# Altium PCB Akustikk_forsterkerkrets_v2.PcbDoc
Units mm, origin at the board's own origin, x right, y up, seen from the top; angles counter-clockwise.
Board outline 133.3 x 70 mm, 3 copper layers (Top Layer, Ground Plane, Bottom Layer), stack 0.488 mm thick; 48 components, 45 nets, 219 pads, 25 vias.
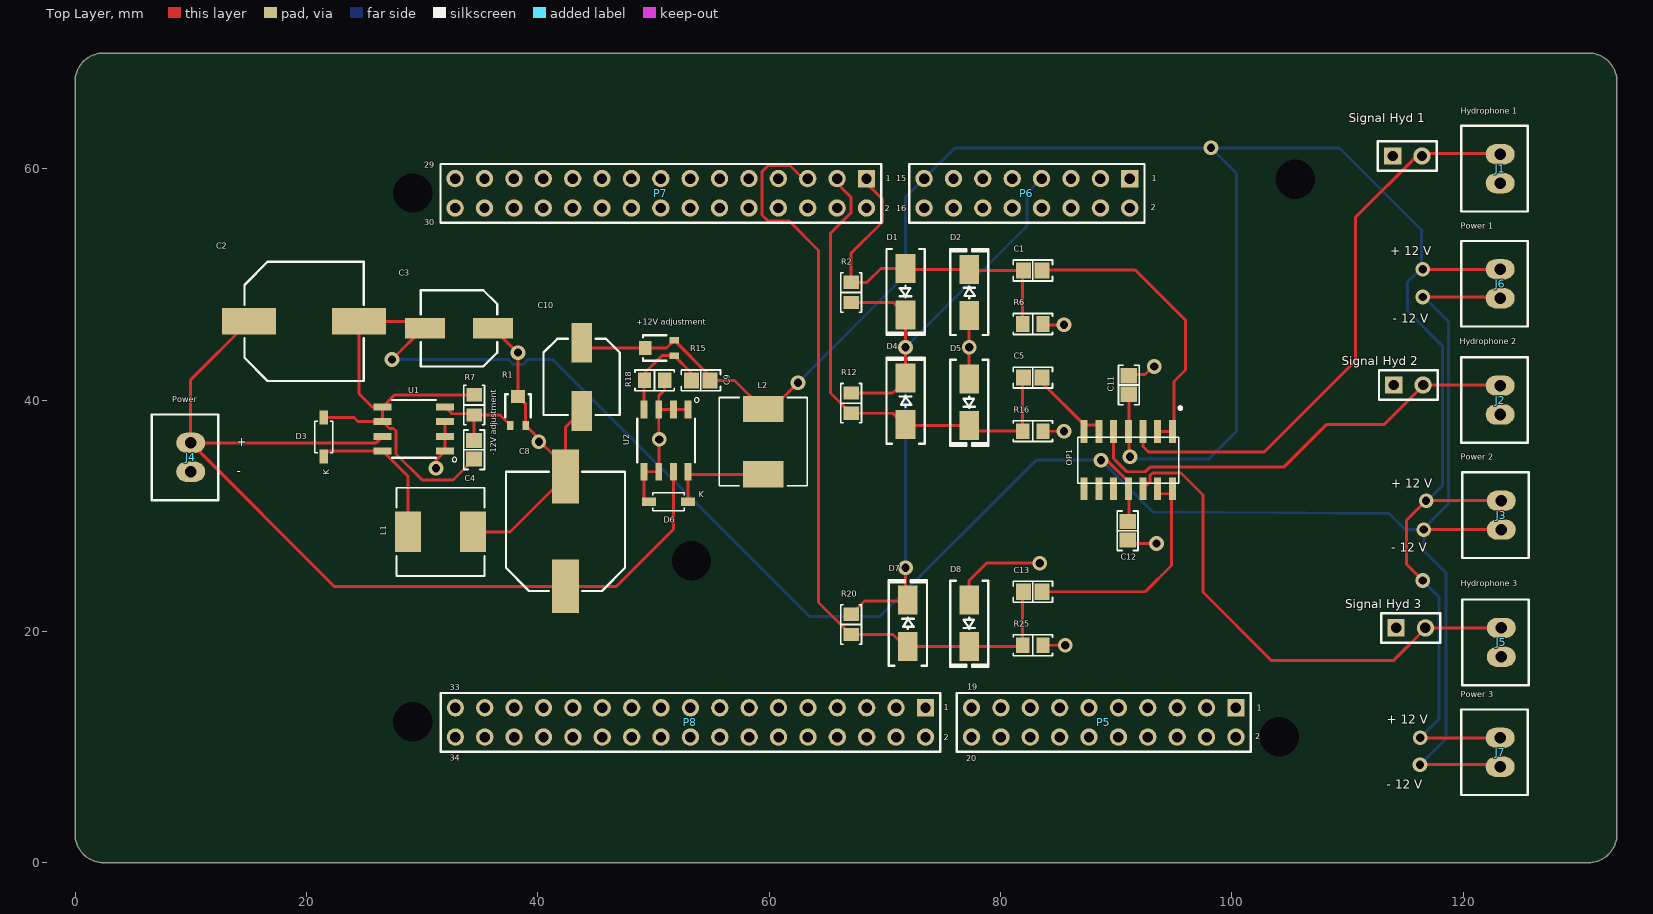
[diagram p0: Top Layer view]
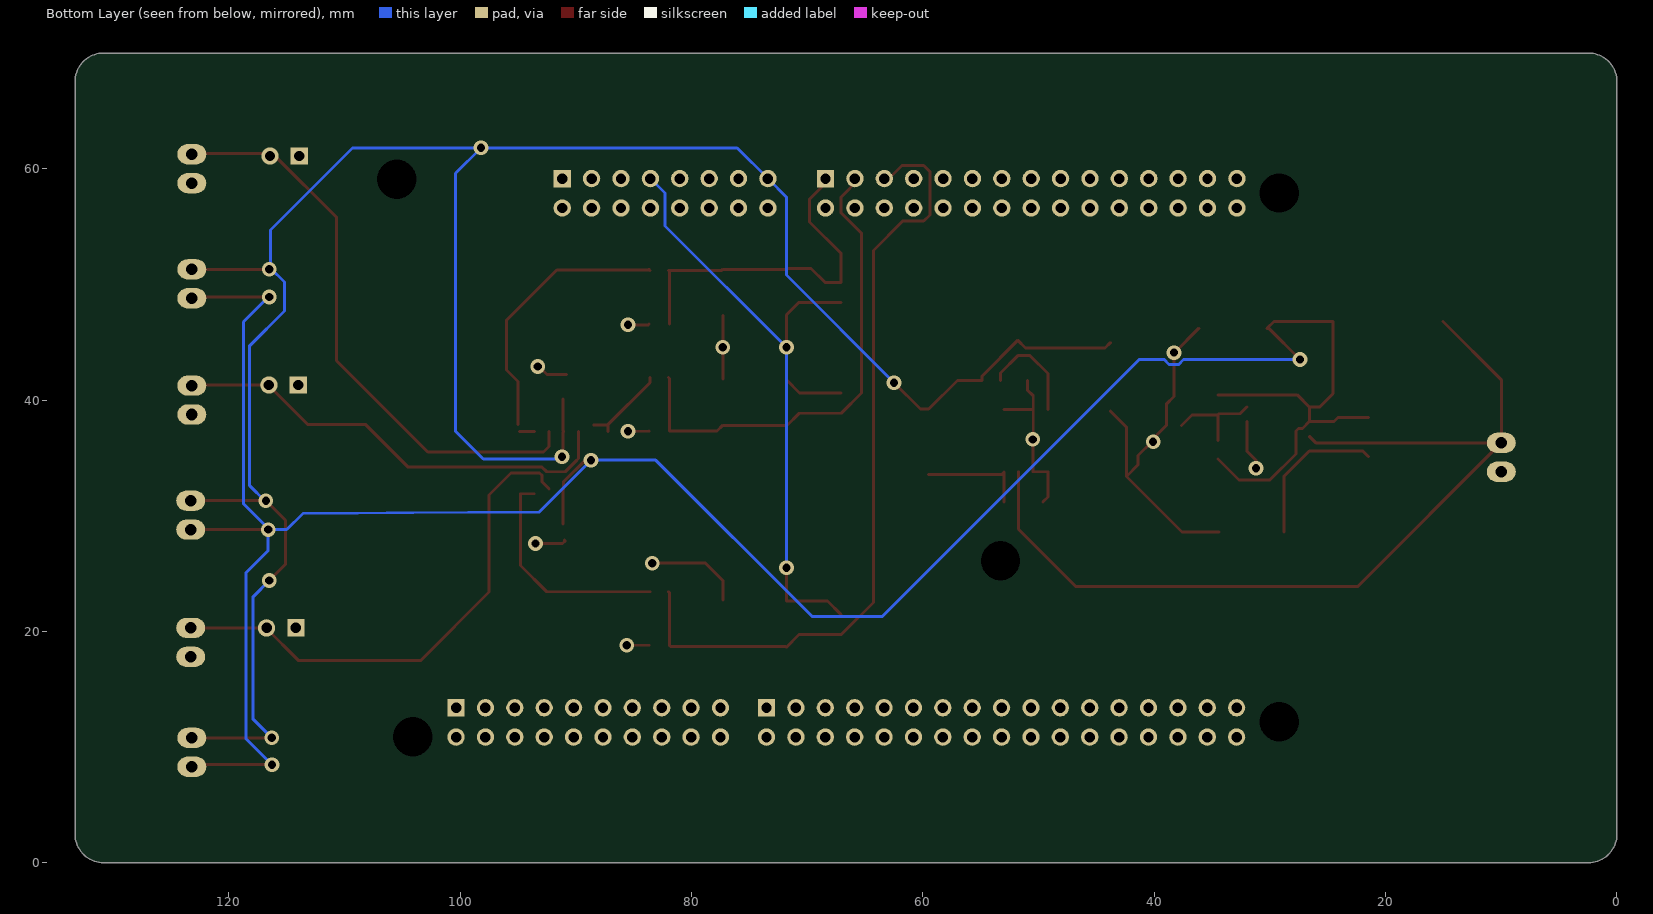
[diagram p1: Bottom Layer view, seen from below]
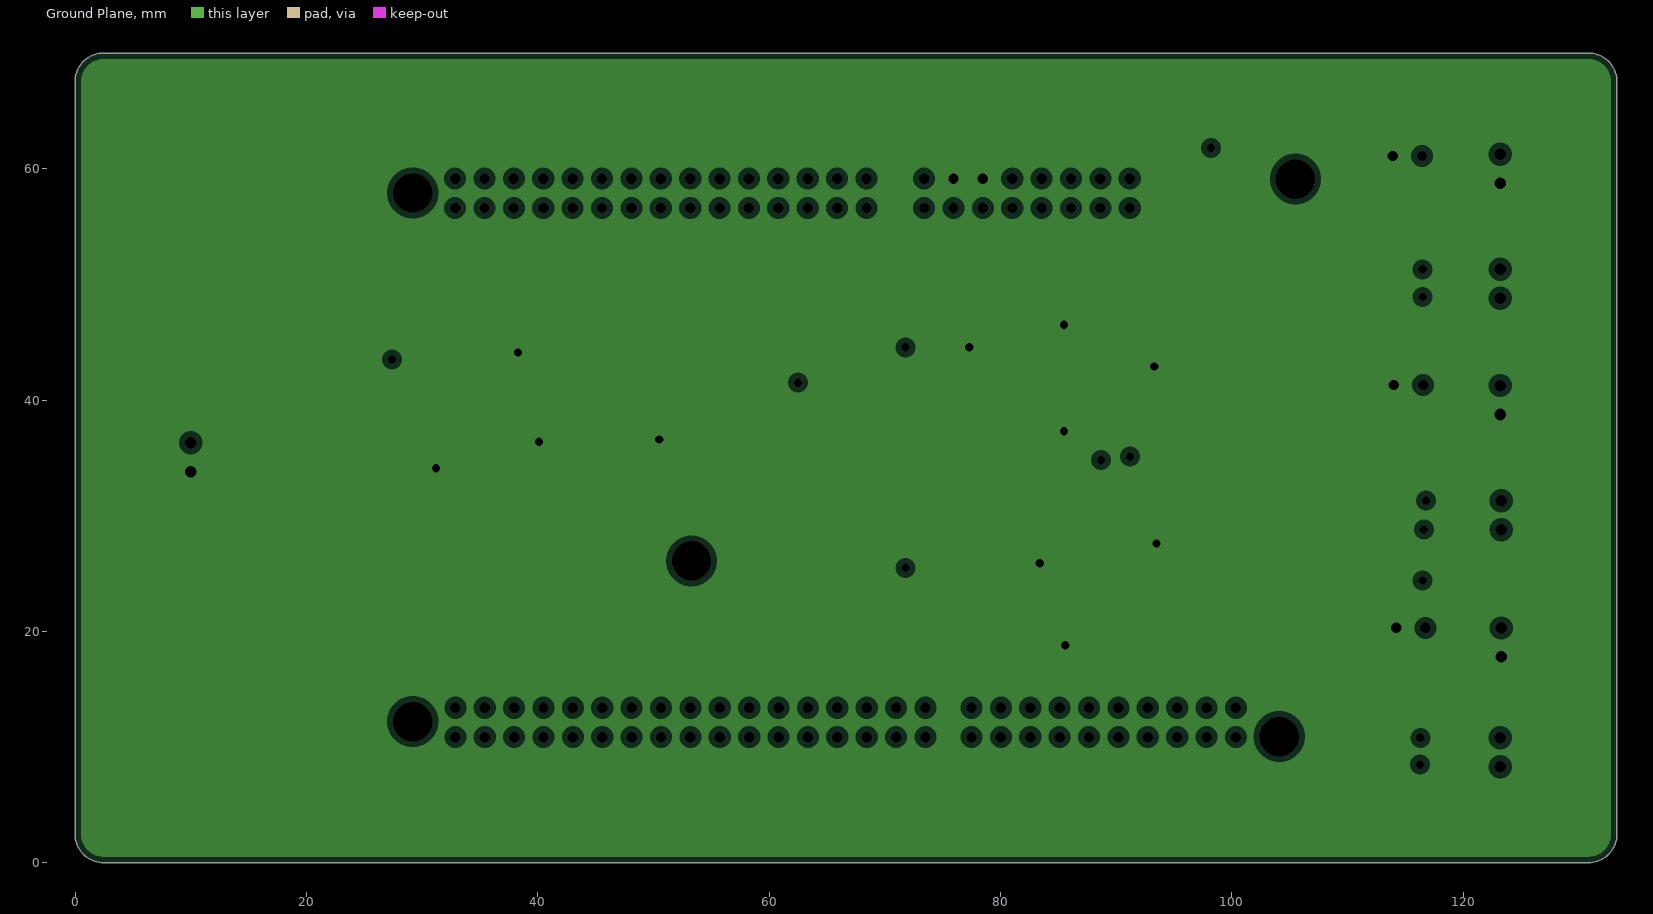
[diagram p2: Ground Plane, clearances drawn from the general rule]
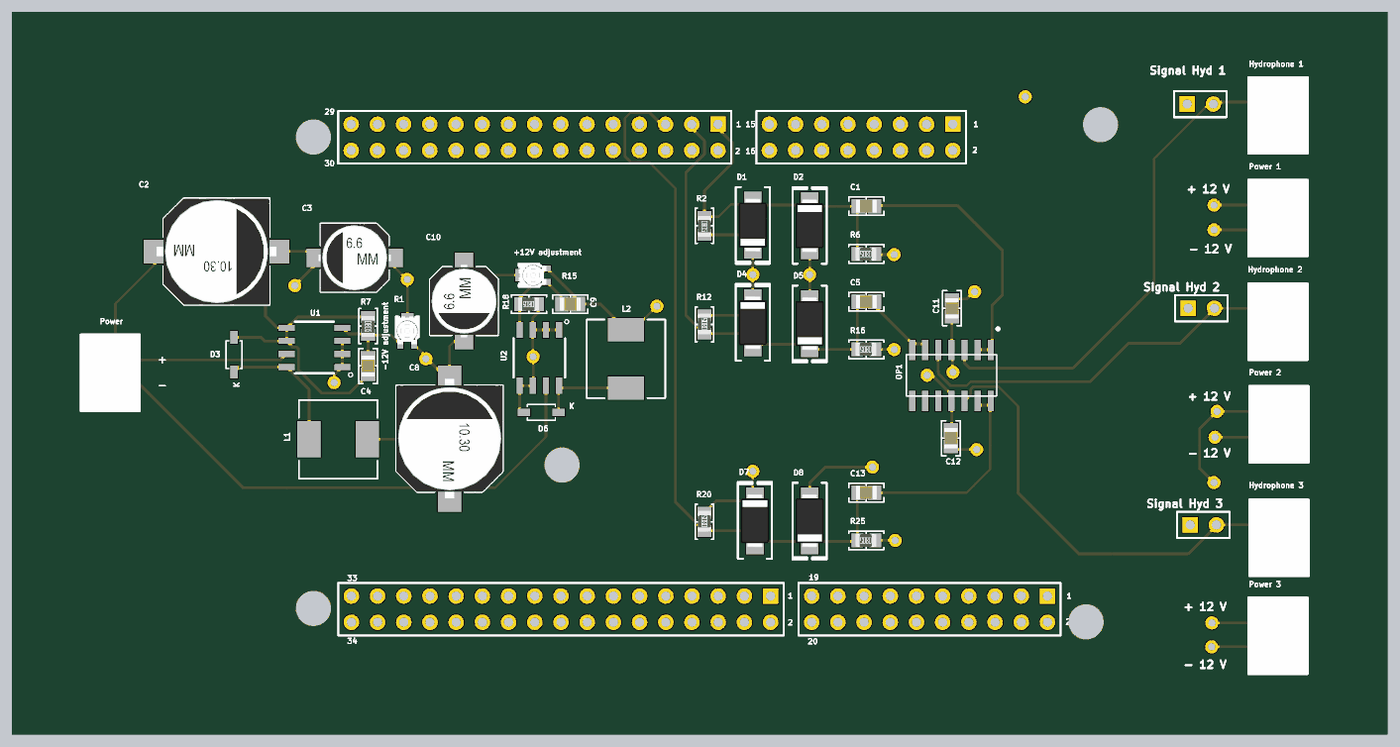
[diagram p3: 3D render of the assembled board from above, using the file's embedded part models]

## Layer stack, top to bottom
Top Solder: solder mask 0.0102, Solder Resist, Dk 3.5
Top Layer: signal copper 0.0356
Dielectric 1: core 0.254, FR-4, Dk 4.2
Ground Plane: plane copper 0.036, net GND
Dielectric 2: prepreg 0.127, Dk 4.2
Bottom Layer: signal copper 0.0356
Bottom Solder: solder mask 0.0102, Solder Resist, Dk 3.5

## Board outline
133.3,2.489 cw(c130.811,2.489) 130.811,0 2.489,0 cw(c2.489,2.489) 0,2.489 0,67.511 cw(c2.489,67.511) 2.489,70 130.811,70 cw(c130.811,67.511) 133.3,67.511

## Design rules (kind name [scope] priority, off if disabled: settings)
Clearance [All] p1: gap=0.254 ignorepadtopadclearanceinfootprint=FALSE except(0: Arc-Hole Track-Hole SMDPad-Hole THPad-Hole Via-Hole Fill-Hole Poly-Hole Region-Hole Text-Hole; 0.1: SMDPad-SMDPad)
PlaneClearance [All] p1: clearance=0.508
PlaneConnect [All] p1: planeconnectstyle=Relief reliefexpansion=0.508 reliefentries=4 reliefconductorwidth=0.254 reliefairgap=0.254
PolygonConnect [All] p1: connectstyle=Relief reliefconductorwidth=0.254 reliefentries=4 polygonreliefangle="90 Angle" airgapwidth=0.254
RoutingVias [All] p1: holewidth=0.711 width=1.27 viastyle="Through Hole" minholewidth=0.711 minwidth=1.27 maxholewidth=0.711 maxwidth=1.27
SolderMaskExpansion [All] p1: expansion=0.102
Width [All] p1: maxlimit=0.254 minlimit=0.254 preferedwidth=0.254
28 further rules are at their usual default settings.

## Classes and differential pairs
component class Akustikk_forsterkerkrets: C1 C2 C3 C4 C5 C8 C9 C10 C11 C12 C13 D1 D2 D3 D4 D5 D6 D7 D8 J1 J2 J3 J4 J5 L1 L2 OP1 P5 P7 P8 R1 R2 R6 R7 R12 R15 R16 R18 R20 R25 U1 U2

## Components (designator, comment, footprint, x,y, rotation, side; value= is the part's Value field where it differs from the comment)
C1 "1uF" "CAP 0805/2012" 82.8,51.2 r180 top
C2 "100uF" "CAP ALUM 10.3MM" 19.8,46.8 r0 top
C3 "220uF" "CAP ALUM 6.6MM" 33.2,46.2 r180 top
C4 "1500pF" "CAP 0805/2012" 34.5,35.7 r90 top
C5 "1uF" "CAP 0805/2012" 82.8,41.943 r180 top
C8 "100uF" "CAP ALUM 10.3MM" 42.4,28.65 r90 top
C9 "1500pF" "CAP 0805/2012" 54.1,41.7 r0 top
C10 "220uF" "CAP ALUM 6.6MM" 43.8,42 r270 top
C11 "0.1uF" "CAP 0805/2012" 91.1,41.3 r270 top
C12 "0.1uF" "CAP 0805/2012" 91,28.7 r270 top
C13 "1uF" "CAP 0805/2012" 82.8,23.429 r180 top
D1 "B130-13-F" "DO214AC SMA" 71.8,49.367 r270 top
D2 "B130-13-F" "DO214AC SMA" 77.3,49.3 r90 top
D3 "1N5819HW-7-F" 1N5819HW-7-F 21.5,36.8 r90 top
D4 "B130-13-F" "DO214AC SMA" 71.8,39.9 r90 top
D5 "B130-13-F" "DO214AC SMA" 77.3,39.811 r270 top
D6 "1N5819HW-7-F" 1N5819HW-7-F 51.3,31.2 r180 top
D7 "B130-13-F" "DO214AC SMA" 72,20.7 r90 top
D8 "B130-13-F" "DO214AC SMA" 77.3,20.7 r270 top
J1 "Hydrophone 1" "JST XH B2B-XH-A" 123.2,60 r270 top
J2 "Hydrophone 2" "JST XH B2B-XH-A" 123.2,40 r270 top
J3 "Power 2" "JST XH B2B-XH-A" 123.3,30.05 r270 top
J4 "Power" "JST XH B2B-XH-A" 10,35.05 r270 top
J5 "Hydrophone 3" "JST XH B2B-XH-A" 123.3,19.05 r270 top
J6 "Power 1" "JST XH B2B-XH-A" 123.2,50.05 r270 top (schematic designator J1)
J7 "Power 3" "JST XH B2B-XH-A" 123.2,9.55 r270 top (schematic designator J1)
L1 "DR74-101-R" DR74-101-R 31.6,28.6 r180 top value="100 µH"
L2 "DR74-101-R" DR74-101-R 59.5,36.4 r270 top value="100 µH"
OP1 "4x Operational Amplifier 25MHz" SOIC127P600X175-14N 91.053,34.8 r270 top
P1 "Signal Hyd1" HDR1X2 113.9,61.1 r0 top
P3 "Valg av forstekning" HDR1X2 114.2,20.3 r0 top
P3 "Valg av forstekning" HDR1X2 114,41.3 r0 top
P5 "CN7 header 10X2" HDR2X10 100.36,13.4 r180 top
P6 "CN8 header 8X2" HDR2X8 91.18,59.14 r180 top
P7 "CN9 header 15X2" HDR2X15 68.42,59.14 r180 top
P8 "CN10 header 17X2" HDR2X17 73.52,13.4 r180 top
R1 "50k" "POT BOURNS TRIMPOT 3302" 38.3,39.1 r0 top
R2 "100k" "RES 0805/2012" 67.1,49.3 r270 top
R6 "100k" "RES 0805/2012" 82.8,46.571 r180 top
R7 "1.21k" "RES 0805/2012" 34.5,39.575 r270 top
R12 "100k" "RES 0805/2012" 67.1,39.733 r90 top
R15 "50k" "POT BOURNS TRIMPOT 3302" 50.5,44.5 r90 top
R16 "100k" "RES 0805/2012" 82.8,37.314 r180 top
R18 "1.21k" "RES 0805/2012" 50.1,41.7 r180 top
R20 "100k" "RES 0805/2012" 67.1,20.6 r90 top
R25 "100k" "RES 0805/2012" 82.8,18.8 r180 top
U1 "SOIC127P600X175-8N" SOIC127P600X175-8N 29.3,37.5 r180 top
U2 "SOIC127P600X175-8N" SOIC127P600X175-8N 51.1,36.5 r270 top

## Footprints (in the part's own frame and the unit in brackets; to place one, negate y for a bottom-side part, rotate by r counter-clockwise, add the part's x,y. Pads: shape width x height; smd on the part's side, far side on the other; paste and mask are expansions set on the pad)
1N5819HW-7-F [mm]
  rect 1.21x0.73 smd: 1(-1.68,0) 2(1.68,0)
  silkscreen extent -1.35,-0.77 1.35,0.78
"CAP 0805/2012" [mm] "Chip Capacitor, 2-Leads, Body 2.00x1.20mm, IPC Medium Density"
  rect 1.3x1.4 smd: 1(-0.8,0) 2(0.8,0)
  silkscreen extent -1.7,-0.9 1.7,0.9, body extent -1,-0.64 1,0.64, height 1.26
"CAP ALUM 6.6MM" [mm] "Aluminum Electrolytic Capacitor, Body 6.60x6.60x7.70mm, IPC Low Density"
  rect 3.45x1.8 smd: 1(-2.95,0) 2(2.95,0)
  silkscreen extent -3.3,-3.3 3.3,3.3, body extent -3.5,-3.3 3.5,3.3, height 7.7
"CAP ALUM 10.3MM" [mm] "Aluminum Electrolytic Capacitor, Body 10.30x10.30x10.50mm, IPC Low Density"
  rect 4.65x2.3 smd: 1(-4.75,0) 2(4.75,0)
  silkscreen extent -5.15,-5.15 5.15,5.15, body extent -5.8,-5.15 5.8,5.15, height 10.5
"DO214AC SMA" [mm] "Molded Diode, 2-Leads, Body 4.30x2.60mm, IPC Medium Density"
  rect 2.5x1.7 smd: 1(-2,0) 2(2,0)
  silkscreen extent -3.68,-1.65 3.75,1.65, body extent -2.6,-1.37 2.6,1.37, height 2.4
DR74-101-R [mil]
  rect 89x138 smd: 1(-111,0) 2(111,0)
  silkscreen extent -150,-150 150,150
HDR1X2 [mm] "Connector; Header; 2 Position"
  rect 1.5x1.5 hole 0.9: 1(0,0)
  round 1.5 hole 0.9: 2(2.54,0)
  silkscreen extent -1.27,-1.27 3.81,1.27
HDR2X8 [mm] "Connector; Header; 8x2 Position"
  rect 1.5x1.5 hole 0.9: 1(0,0)
  round 1.5 hole 0.9: 2(0,2.54) 3(2.54,0) 4(2.54,2.54) 5(5.08,0) 6(5.08,2.54) 7(7.62,0) 8(7.62,2.54) 9(10.16,0) 10(10.16,2.54) 11(12.7,0) 12(12.7,2.54) 13(15.24,0) 14(15.24,2.54) 15(17.78,0) 16(17.78,2.54)
  silkscreen extent -1.27,-1.27 19.05,3.81
HDR2X10 [mm] "Connector; Header; 10x2 Position"
  rect 1.5x1.5 hole 0.9: 1(0,0)
  round 1.5 hole 0.9: 2(0,2.54) 3(2.54,0) 4(2.54,2.54) 5(5.08,0) 6(5.08,2.54) 7(7.62,0) 8(7.62,2.54) 9(10.16,0) 10(10.16,2.54) 11(12.7,0) 12(12.7,2.54) 13(15.24,0) 14(15.24,2.54) 15(17.78,0) 16(17.78,2.54) 17(20.32,0) 18(20.32,2.54) 19(22.86,0) 20(22.86,2.54)
  silkscreen extent -1.27,-1.27 24.13,3.81
HDR2X15 [mm] "Connector; Header; 15x2 Position"
  rect 1.5x1.5 hole 0.9: 1(0,0)
  round 1.5 hole 0.9: 2(0,2.54) 3(2.54,0) 4(2.54,2.54) 5(5.08,0) 6(5.08,2.54) 7(7.62,0) 8(7.62,2.54) 9(10.16,0) 10(10.16,2.54) 11(12.7,0) 12(12.7,2.54) 13(15.24,0) 14(15.24,2.54) 15(17.78,0) 16(17.78,2.54) 17(20.32,0) 18(20.32,2.54) 19(22.86,0) 20(22.86,2.54) 21(25.4,0) 22(25.4,2.54) 23(27.94,0) 24(27.94,2.54) 25(30.48,0) 26(30.48,2.54) 27(33.02,0) 28(33.02,2.54) 29(35.56,0) 30(35.56,2.54)
  silkscreen extent -1.27,-1.27 36.83,3.81
HDR2X17 [mm] "Connector; Header; 17x2 Position"
  rect 1.5x1.5 hole 0.9: 1(0,0)
  round 1.5 hole 0.9: 2(0,2.54) 3(2.54,0) 4(2.54,2.54) 5(5.08,0) 6(5.08,2.54) 7(7.62,0) 8(7.62,2.54) 9(10.16,0) 10(10.16,2.54) 11(12.7,0) 12(12.7,2.54) 13(15.24,0) 14(15.24,2.54) 15(17.78,0) 16(17.78,2.54) 17(20.32,0) 18(20.32,2.54) 19(22.86,0) 20(22.86,2.54) 21(25.4,0) 22(25.4,2.54) 23(27.94,0) 24(27.94,2.54) 25(30.48,0) 26(30.48,2.54) 27(33.02,0) 28(33.02,2.54) 29(35.56,0) 30(35.56,2.54) 31(38.1,0) 32(38.1,2.54) 33(40.64,0) 34(40.64,2.54)
  silkscreen extent -1.27,-1.27 41.91,3.81
"JST XH B2B-XH-A" [mm]
  oval 1.75x2.5 hole 1: 1(-1.25,0) 2(1.25,0)
  silkscreen extent -3.7,-3.38 3.7,2.38, body extent -3.7,-3.38 3.7,2.38, height 7
"POT BOURNS TRIMPOT 3302" [mm] "Bourns Trimpot 3302 - Open Frame 2.75mm x 2.20mm x 1.05mm"
  rect 0.575x0.8 smd: 1(-0.662,-1.3) 3(0.662,-1.3)
  rect 1.2x1.1 smd: 2(0,1.2)
  silkscreen extent -1.1,-0.6 1.1,1.4, body extent -1.1,-1.3 1.1,1.45, height 0.81
"RES 0805/2012" [mm] "Chip Resistor, 2-Leads, Body 2.00x1.25mm, IPC Medium Density"
  rect 1.15x1.35 smd: 1(-0.875,0) 2(0.875,0)
  silkscreen extent -1.7,-0.9 1.7,0.9, body extent -0.95,-0.62 1.05,0.63, height 0.6
SOIC127P600X175-8N [mm]
  rect 1.55x0.6 smd: 1(-2.7,1.905) 2(-2.7,0.635) 3(-2.7,-0.635) 4(-2.7,-1.905) 5(2.7,-1.905) 6(2.7,-0.635) 7(2.7,0.635) 8(2.7,1.905)
  silkscreen extent -3.7,-2.5 1.9,2.85
SOIC127P600X175-14N [mm]
  rect 1.97x0.6 smd: 1(-2.475,3.81) 2(-2.475,2.54) 3(-2.475,1.27) 4(-2.475,0) 5(-2.475,-1.27) 6(-2.475,-2.54) 7(-2.475,-3.81) 8(2.475,-3.81) 9(2.475,-2.54) 10(2.475,-1.27) 11(2.475,0) 12(2.475,1.27) 13(2.475,2.54) 14(2.475,3.81)
  silkscreen extent -4.6,-4.38 2,4.6

## Part data
C1 C5 C13: library part C0805C105J3RACTU, "CAP CER 1UF 25V X7R 0805", Device Package="0805 (2012 Metric)", Manufacturer=Kemet, Supplier Part Number 1=399-10060-2-ND, TemperatureCoefficient=X7R, TemperatureRange="-55C ~ 125C", Tolerance=5%, Voltage=25V, ComponentLink1Description=Datasheet, ComponentLink1URL=http://www.kemet.com/docfinder?Partnumber=C0805C105J3RACTU, ComponentLink2Description="Digi-Key listing", ComponentLink2URL=http://digikey.com/product-detail/en/C0805C105J3RACTU/399-10060-2-ND/2211758, PartId=6145, Part Number=C0805C105J3RACTU, Price=0,355, Supplier 1=Digi-Key, Type=-
C2 C8: library part EEE-FC1H101P, "CAP ALUM 100UF 20% 50V SMD", Device Package="Radial, Can - SMD", Lifetime @ Temp="1000 Hrs @ 105C", Manufacturer="Panasonic Electronic Components", Ripple Current=375mA, Supplier Part Number 1=PCE4013TR-ND, TemperatureRange="-40C ~ 105C", Tolerance=20%, Voltage=50V, ComponentLink1Description=Datasheet, ComponentLink1URL=http://industrial.panasonic.com/www-cgi/jvcr13pz.cgi?E+PZ+3+ABA0005+EEEFC1H101P+7+WW, ComponentLink2Description="Digi-Key listing", ComponentLink2URL=http://digikey.com/product-detail/en/EEE-FC1H101P/PCE4013TR-ND/817422, Impedance="300 mOhm", PartId=7438, Part Number=EEE-FC1H101P, Price=0,4156, Supplier 1=Digi-Key, Type=AEC-Q200
C3 C10: library part EEE-FTE221XAP, "CAP ALUM 220UF 20% 25V SMD", Device Package="Radial, Can - SMD", Lifetime @ Temp="2000 Hrs @ 105C", Manufacturer="Panasonic Electronic Components", Ripple Current=390mA, Supplier Part Number 1=PCE5009TR-ND, TemperatureRange="-55C ~ 105C", Tolerance=20%, Voltage=25V, ComponentLink1Description=Datasheet, ComponentLink1URL=http://industrial.panasonic.com/lecs/www-data/pdf/ABA0000/ABA0000CE135.pdf, ComponentLink2Description="Digi-Key listing", ComponentLink2URL=http://digikey.com/product-detail/en/EEE-FTE221XAP/PCE5009TR-ND/2652040, Impedance=-, PartId=7275, Part Number=EEE-FTE221XAP, Price=0,3668, Supplier 1=Digi-Key, Type=Automotive
C4 C9: library part C2012C0G1H152J060AA, "CAP CER 1500PF 50V C0G 0805", Device Package="0805 (2012 Metric)", Manufacturer="TDK Corporation", Supplier Part Number 1=445-1331-2-ND, TemperatureCoefficient="C0G, NP0", TemperatureRange="-55C ~ 125C", Tolerance=5%, Voltage=50V, ComponentLink1Description=Datasheet, ComponentLink1URL=https://product.tdk.com/info/en/catalog/datasheets/mlcc_commercial_general_en.pdf, ComponentLink2Description="Digi-Key listing", ComponentLink2URL=http://digikey.com/product-detail/en/C2012C0G1H152J060AA/445-1331-2-ND/513857, PartId=4413, Part Number=C2012C0G1H152J060AA, Price=0,0308, Supplier 1=Digi-Key, Type=-
C11 C12: library part CL21B104KACNNNC, "CAP CER 0.1UF 25V X7R 0805", Device Package="0805 (2012 Metric)", Manufacturer="Samsung Electro-Mechanics America, Inc.", Supplier Part Number 1=1276-1099-2-ND, TemperatureCoefficient=X7R, TemperatureRange="-55C ~ 125C", Tolerance=10%, Voltage=25V, ComponentLink1Description=Datasheet, ComponentLink1URL=http://www.samsungsem.com/kr/support/product-search/mlcc/CL21B104KACNNNC.jsp, ComponentLink2Description="Digi-Key listing", ComponentLink2URL=http://digikey.com/product-detail/en/CL21B104KACNNNC/1276-1099-2-ND/3886757, PartId=5699, Part Number=CL21B104KACNNNC, Price=0,0099, Supplier 1=Digi-Key, Type=-
D1 D2 D4 D5 D7 D8: "DIODE SCHOTTKY 30V 1A SMA", Current Rectified=1A, Current Reverse Leakage @ Vr="500uA @ 30V", Device Package="DO-214AC, SMA", Junction Operating Temperature="-65C ~ 150C", Manufacturer="Diodes Incorporated", Supplier Part Number 1=B130-FDITR-ND, Voltage DC Reverse (Vr)=30V, Voltage Forward (Vf)="500mV @ 1A", ComponentLink1Description=Datasheet, ComponentLink1URL=http://www.diodes.com/_files/datasheets/ds13002.pdf, ComponentLink2Description="Digi-Key Listing", ComponentLink2URL=http://www.digikey.ca/product-detail/en/B130-13-F/B130-FDITR-ND/814935, PartId=7122, Part Number=B130-13-F, Price=0,0852, Reverse Recovery Time (trr)=-, Supplier 1=Digi-Key, Type="Surface Mount"
D3 D6: "1N5819HW Series 40 V 1 A Surface Mount Schottky Barrier Rectifier - SOD-123", Package="SOD-123 Diodes Inc.", Supplier Part Number 1=1N5819HW-FDICT-ND, ComponentLink1Description="Manufacturer Link", ComponentLink1URL=https://www.digikey.no/en/supplier-centers/d/diodes, ComponentLink2Description=Datasheet, ComponentLink2URL=https://www.diodes.com/assets/Datasheets/ds30217.pdf, Digi-Key_Part_Number=1N5819HW-FDICT-ND, Digi-Key_Purchase_URL=https://www.digikey.no/product-detail/en/diodes-incorporated/1N5819HW-7-F/1N5819HW-FDICT-ND/815283?utm_source=snapeda&utm_medium=aggregator&utm_campaign=symbol, MF="Diodes Inc.", MP=1N5819HW-7-F, Part Number=1N5819HW-7-F, SnapEDA_Link=https://www.snapeda.com/parts/1N5819HW-7-F/Diodes%20Inc./view-part/?ref=snap, Supplier 1=Digi-Key
J1 J2 J3 J4 J5 J6 J7: library part B2B-XH-A(LF)(SN), "CONN HEADER XH TOP 2POS 2.5MM", Colour=Natural, Manufacturer="JST Sales America Inc.", Supplier Part Number 1=455-2247-ND, ComponentLink1Description=Datasheet, ComponentLink1URL=http://www.jst-mfg.com/product/pdf/eng/eXH.pdf, ComponentLink2Description="Digi-Key Listing", ComponentLink2URL=http://www.digikey.com/product-detail/en/jst-sales-america-inc/B2B-XH-A(LF)(SN)/455-2247-ND/1651045, Contact Finish=Tin, Fastening Type="Detent Lock", Number Of Positions=2, Number Of Rows=1, PartId=16449, Part Number=B2B-XH-A(LF)(SN), Pitch="0.098\" (2.50mm)", Price=0,15, Series=XH, Supplier 1=Digi-Key, Type="Header, Shrouded"
L1 L2: "Inductor Power Shielded Drum Core 101.6uH/100uH 20% 100KHz Ferrite 860mA 383mOhm DCR T/R", Package="Nonstandard Eaton", Supplier Part Number 1=513-1225-1-ND, Availability=Unavailable, ComponentLink1Description="Manufacturer Link", ComponentLink1URL=https://www.digikey.no/en/supplier-centers/e/eaton, ComponentLink2Description=Datasheet, ComponentLink2URL=https://www.eaton.com/content/dam/eaton/products/electronic-components/resources/data-sheet/eaton-dr-high-power-density-high-efficiency-shielded-drum-core-power-inductors-data-sheet.pdf, Irms=860mA, MF=Eaton, MP=DR74-101-R, Part Number=DR74-101-R, Price=None, SnapEDA_Link=https://www.snapeda.com/parts/DR74-101-R/Eaton/view-part/?ref=snap, Supplier 1=Digi-Key
OP1: library part LM837MX/NOPB, Supplier Part Number 1=296-43966-1-ND, ComponentLink1Description="Manufacturer Link", ComponentLink1URL=http://www.ti.com/, ComponentLink2Description=Datasheet, ComponentLink2URL=http://www.ti.com/lit/ds/symlink/lm837.pdf, Part Number=LM837MX/NOPB, Supplier 1=Digi-Key
P1 P3 P3: library part "Header 2", "Header, 2-Pin", LatestRevisionDate=17-Jul-2002, LatestRevisionNote="Re-released for DXP Platform.", Publisher="Altium Limited"
P5: library part "Header 10X2", "Header, 10-Pin, Dual row", LatestRevisionDate=17-Jul-2002, LatestRevisionNote="Re-released for DXP Platform.", Publisher="Altium Limited"
P6: library part "Header 8X2", "Header, 8-Pin, Dual row", LatestRevisionDate=17-Jul-2002, LatestRevisionNote="Re-released for DXP Platform.", Publisher="Altium Limited"
P7: library part "Header 15X2", "Header, 15-Pin, Dual row", LatestRevisionDate=17-Jul-2002, LatestRevisionNote="Re-released for DXP Platform.", Publisher="Altium Limited"
P8: library part "Header 17X2", "Header, 17-Pin, Dual row", LatestRevisionDate=17-Jul-2002, LatestRevisionNote="Re-released for DXP Platform.", Publisher="Altium Limited"
R1 R15: library part 3302W-3-203E, "TRIMMER 20K OHM 0.15W SMD", Manufacturer="Bourns Inc.", PowerRating=0.15W, Supplier Part Number 1=3302W-203ECT-ND, TemperatureCoefficient=250ppm/C, Tolerance=25%, Adjustment Type="Top Adjustment", ComponentLink1Description=Datasheet, ComponentLink1URL=http://www.bourns.com/docs/Product-Datasheets/3302.pdf, ComponentLink2Description="Digi-Key Listing", ComponentLink2URL=https://www.digikey.com/product-detail/en/bourns-inc/3302W-3-203E/3302W-203ECT-ND/612878, Number Of Turns=1, PartId=29442, Part Number=3302W-3-203E, Price=0,97, Supplier 1=Digi-Key
R2 R6 R12 R16 R20 R25: library part ERJ-6GEYJ104V, "RES SMD 100K OHM 5% 1/8W 0805", Device Package="0805 (2012 Metric)", Manufacturer="Panasonic Electronic Components", PowerRating="0.125W, 1/8W", Supplier Part Number 1=P100KATR-ND, TemperatureCoefficient=200ppm/C, TemperatureRange="-55C ~ 155C", Tolerance=5%, ComponentLink1Description=Datasheet, ComponentLink1URL=http://industrial.panasonic.com/www-cgi/jvcr13pz.cgi?E+PZ+3+AOA0001+ERJ6GEYJ104V+7+WW, ComponentLink2Description="Digi-Key Listing", ComponentLink2URL=https://www.digikey.com/product-detail/en/panasonic-electronic-components/ERJ-6GEYJ104V/P100KATR-ND/83110, PartId=11445, Part Number=ERJ-6GEYJ104V, Price=0,0032, Supplier 1=Digi-Key
R7 R18: library part ERA-6AEB1211V, "RES SMD 1.21K OHM 0.1% 1/8W 0805", Device Package="0805 (2012 Metric)", Manufacturer="Panasonic Electronic Components", PowerRating="0.125W, 1/8W", Supplier Part Number 1=P1.21KDATR-ND, TemperatureCoefficient=25ppm/C, TemperatureRange="-55C ~ 155C", Tolerance=0.1%, ComponentLink1Description=Datasheet, ComponentLink1URL=http://industrial.panasonic.com/lecs/www-data/pdf/AOA0000/AOA0000CE26.pdf, ComponentLink2Description="Digi-Key listing", ComponentLink2URL=http://digikey.com/product-detail/en/ERA-6AEB1211V/P1.21KDATR-ND/2025670, PartId=2672, Part Number=ERA-6AEB1211V, Price=0,0653, Supplier 1=Digi-Key, Type="Thin Film"
U1 U2: "SIMPLE SWITCHER® 40V, 500mA Low Component Count Step-Down Regulator 8-SOIC -40 to 125", Package="SOIC-8 Texas Instruments", Supplier Part Number 1=LM2594DADJR2GOSCT-ND, Availability=Unavailable, ComponentLink1Description="Manufacturer Link", ComponentLink1URL=https://www.digikey.com/en/supplier-centers/o/on-semiconductor, ComponentLink2Description=Datasheet, ComponentLink2URL=ww.onsemi.com/pub/Collateral/LM2594-D.PDF, Iout,max=500mA, MF="Texas Instruments", MP=LM2674MX-12/NOPB, Part Number=SOIC127P600X175-8N, Price=None, SnapEDA_Link=https://www.snapeda.com/parts/LM2674MX-12/NOPB/Texas%20Instruments/view-part/?ref=snap, Supplier 1=Digi-Key, Vin,max=40V, Vin,min=4.5V, Vout,max=37V, Vout,min=1.23V

## Free pads (board coordinates)
  round 1.524 hole 3.4: 4(29.2,57.9) 5(29.2,12.2) 6(104.1,10.9) 7(105.5,59.1) 8(53.3,26.1)

## Via types
v1: diameter 1.27, hole 0.711, Top Layer to Bottom Layer, 25 vias

## Nets (pads, with @x,y where several pads share a name; then routed paths per layer and width w, separated by ;. In a path a pad name is that pad's centre, name@x,y a point inside that pad or via, vN(x,y) a via of type N, cw(c..) or ccw(c..) an arc to the next point about the centre after c; other vN are vias at no path point)
+3,3VDC: D1.2 D4.2 D7.2 P6.7 R2.2 R12.2 R20.2 | length 62.3
  Top Layer w0.254: R20.2 68.258,22.633 71.8,22.633 v1(71.8,25.5) ; R12.2 70.664,40.608 71.8,41.744 v1(71.8,44.556) D1.2 70.742,48.425 R2.2
  Bottom Layer w0.254: v1(71.8,25.5) v1(71.8,44.556) 82.3,55.056 82.3,57.9 83.16,58.76 P6.7@83.16,59.14
+12VDC: C9.2 C10.1 C11.2 J3.1 J6.1 J7.1 L2.1 OP1.4 P6.15 R15.2 R15.3 | length 202.2
  Top Layer w0.254: C10.1 44.25,44.5 R15.2 51.137,44.5 R15.3 54.9,42.063 C9.2 57.019,41.7 L2.1 60.219,39.219 v1(62.5,41.5) ; C11.2@91.1,40.1 91.1,37.323 OP1.4 91.126,37.201 91.126,35.174 v1(91.2,35.1) ; v1(116.3,10.8) J7.1@123,10.8 ; v1(116.5,24.4) 115.1,25.8 115.1,29.6 v1(116.8,31.3) J3.1 ; v1(116.5,51.3) J6.1 ; J6.1@122.9,51.6 J6.1 ; J6.1@123.4,51.3 123.3,51.4 J6.1
  Bottom Layer w0.254: v1(62.5,41.5) 71.8,50.8 71.8,57.54 P6.15 76.06,61.8 v1@98.1,61.8 ; v1@91.163,35.137 v1(91.2,35.1) 91.4,34.9 98,34.9 ; v1@98,61.9 v1@98.1,61.8 ; 98.05,34.95 100.4,37.3 100.4,59.6 v1(98.2,61.8) ; v1(116.3,10.8) 117.9,12.4 117.9,23 v1(116.5,24.4) ; v1@116.875,31.275 118.2,32.6 118.2,33.5 118.2,44.7 115.2,47.7 115.2,50.2 116.4,51.4 116.4,54.7 109.3,61.8 108.3,61.8 v1(98.2,61.8) ; v1@98.1,61.8 v1(98.2,61.8)
-12VDC: C2.2 C3.2 C4.1 C12.1 D3.2 J3.2 J6.2 J7.2 OP1.11 R7.1 U1.5 U1.6 | length 223.5
  Top Layer w0.254: D3.2 24.12,38.48 24.465,38.135 U1.6 ; v1(27.4,43.5) 30.1,46.2 C3.2 29.65,46.8 C2.2 24.55,40.55 25.695,39.405 U1.5 ; C4.1 32.684,33.084 30.016,33.084 27.756,35.344 27.756,37.323 27.533,37.546 27.189,37.546 U1.6 ; R7.1 27.645,40.45 U1.5 ; v1(88.7,34.8) 89.2,34.8 91.052,32.948 OP1.11 91.1,32.278 C12.1@91.1,29.3 ; v1(116.275,8.475) 123.025,8.475 J7.2@123.1,8.4 ; v1(116.5,48.9) J6.2@123.1,48.9 ; v1(116.6,28.8) J3.2 ; U1.6 U1.5
  Bottom Layer w0.254: v1(27.4,43.5) 37.463,43.5 37.879,43.084 38.721,43.084 39.137,43.5 41.3,43.5 63.5,21.3 69.6,21.3 83.1,34.8 v1(88.7,34.8) 93.2,30.3 98.3,30.3 ; 98.3,30.3 99.2,30.3 ; 99.3,30.3 99.2,30.3 ; v1(116.275,8.475) 118.5,10.7 118.5,25.1 116.6,27 v1(116.6,28.8) 115,28.8 113.6,30.2 99.2,30.3 ; v1@116.438,48.793 116.427,48.892 116.419,48.965 v1(116.5,48.9) ; v1@116.546,48.946 118.73,46.762 118.73,31.03 v1@116.55,28.85
GND: C3.1 C8.2 C10.2 C11.1 C12.2 D2.1 D5.1 D6.2 D8.1 J1.2 J2.2 J4.2 J5.2 L1.1 P1.1 P3.1 P6.11 P6.13 R1.2 R1.3 R6.1 R16.1 R18.1 R25.1 U1.1 U1.2 U1.3 U2.1 U2.2 U2.3 U2.5 U2.6 | length 76.3
  Top Layer w0.254: v1(31.2,34.1) 31.2,34.795 U1.1 U1.2 U1.3 ; L1.1 37.6,28.6 C8.2 ; C3.1 v1@38.3,44.05 ; v1(38.3,44.1) v1@38.3,44.05 ; v1(40.1,36.4) v1@40.2,36.4 ; C10.2 42.4,37.65 C8.2 ; D6.2 49.195,31.625 U2.5 U2.6 50.5,33.835 v1(50.5,36.6) 50.465,36.635 U2.3 ; R18.1 50.975,40.875 50.465,40.365 U2.3 ; U2.1 U2.2 U2.3 ; D8.1 77.3,24.4 78.8,25.9 v1(83.4,25.9) ; D5.1 v1(77.3,44.556) D2.1 ; R25.1 v1(85.6,18.8) ; R16.1 83.689,37.3 v1(85.5,37.3) ; R6.1 83.746,46.5 v1(85.5,46.5) ; C11.1@90.8,42.2 92.5,42.2 93.2,42.9 v1(93.3,42.9) ; C12.2 90.925,27.825 91.15,27.6 v1(93.5,27.6) ; J1.2@122.95,58.5 J1.2@123.05,58.6 ; J2.2@123.05,38.6 J2.2@123.15,38.7 ; v1@38.3,44.05 R1.2 38.962,39.638 R1.3 40.3,36.463 40.237,36.4 v1@40.2,36.4 ; v1@40.2,36.4 41.4,35.2 41.4,34.4 C8.2
NetC1_1: C1.1 OP1.1 OP1.2 | length 25
  Top Layer w0.254: C1.1 C1.1@83.7,51.3 ; C1.1@83.65,51.25 91.65,51.25 96,46.9 96,42.6 95,41.6 OP1.1@95,37.9 ; OP1.2 OP1.1@94.869,37.275 ; OP1.1 OP1.1@94.875,37.275
NetC1_2: C1.2 D1.1 D2.2 P7.1 R2.1 R6.2 | length 30.9
  Top Layer w0.254: P7.1@68.02,59.14 69.8,57.36 69.8,55.4 67.1,52.7 R2.1 68.475,50.175 69.667,51.367 D1.1 71.867,51.3 D2.2 77.4,51.2 C1.2 81.925,51.125 R6.2
NetC4_2: C4.2 R1.1 R7.2 U1.4 | length 8.5
  Top Layer w0.254: U1.4 32.589,38.816 34.384,38.816 R7.2 ; C4.2 R7.2 ; R1.1 36.738,38.7 R7.2
NetC5_1: C5.1 OP1.6 OP1.7 | length 7.4
  Top Layer w0.254: C5.1 83.6,41.5 OP1.7@87.242,37.858 ; OP1.7 OP1.7@87.242,37.858 ; OP1.6@88.458,37.858 OP1.7@87.242,37.858
NetC5_2: C5.2 D4.1 D5.2 P7.3 R12.1 R16.2 | length 42.6
  Top Layer w0.254: P7.3@65.48,59.14 67.1,57.52 67.1,56.221 65.3,54.421 65.3,40.62 67.061,38.858 R12.1 70.686,38.858 71.8,37.744 71.867,37.811 D5.2 77.797,37.314 R16.2 81.925,41.868 C5.2
NetC9_1: C9.1 R15.1 R18.2 U2.4 | length 9.1
  Top Layer w0.254: U2.4 49.195,42.295 50.738,43.838 R15.1 53.3,42.337 C9.1
NetC13_1: C13.1 OP1.13 OP1.14 | length 19.5
  Top Layer w0.254: C13.1 92.529,23.429 94.8,25.7 94.8,31.9 OP1.13@93.6,31.9
NetC13_2: C13.2 D7.1 D8.2 P7.5 R20.1 R25.2 | length 68.5
  Top Layer w0.254: P7.5@62.94,59.14 61.809,60.271 59.932,60.271 59.4,59.739 59.4,56 59.932,55.469 61.753,55.469 64.284,52.938 64.284,22.502 67.061,19.725 R20.1 70.708,19.725 71.8,18.633 71.867,18.7 D8.2 81.825,18.7 R25.2 81.925,23.354 C13.2
NetC14_1: OP1.8
NetC14_2: P7.7
NetD3_1: D3.1 L1.2 U1.8 | length 13.2
  Top Layer w0.254: D3.1 21.975,35.595 U1.8 28.781,33.414 L1.2
NetD6_1: D6.1 L2.2 U2.8 | length 9.2
  Top Layer w0.254: D6.1 52.98,33.775 53.174,33.581 L2.2
NetIC1_1: 
NetIC1_2: 
NetIC1_3: 
NetIC1_4: 
NetIC1_6: J1.1 OP1.3 P1.2 | length 50.3
  Top Layer w0.254: OP1.3 92.322,35.978 92.8,35.5 102.8,35.5 110.7,43.4 110.7,55.8 116.2,61.3 123.05,61.3 J1.1@123.15,61.2
NetIC1_10: J2.1 OP1.5 P3.2@116.54,41.3 | length 39.1
  Top Layer w0.254: OP1.5 89.766,37.258 89.766,35.198 89.782,35.181 89.782,34.936 90.003,34.716 90.918,33.8 92.525,33.8 92.924,34.199 104.499,34.199 108.2,37.9 113.2,37.9 P3.2@116.4,41.1 ; P3.2@116.54,41.3 J2.1@123.15,41.3
NetIC1_13: 
NetIC1_14: 
NetIC1_15: 
NetIC1_16: 
NetIC2_1: 
NetIC2_2: 
NetIC2_3: 
NetIC2_4: 
NetIC2_6: J5.1 OP1.12 P3.2@116.74,20.3 | length 44.7
  Top Layer w0.254: OP1.12 92.911,32.914 92.911,33.468 93.135,33.691 95.609,33.691 97.5,31.8 97.5,23.4 103.4,17.5 114,17.5 116.8,20.3 J5.1
NetIC2_10: OP1.10
NetIC2_13: 
NetIC2_14: 
NetIC2_15: 
NetIC2_16: 
NetOP1_2: 
NetOP1_6: 
NetOP1_9: OP1.9
NetOP1_13: 
NetP1_2: 
NetP3_2: 
NetP4_2: 
NetP9_2: 
Vbat+: C2.1 C8.1 J4.1 U1.7 U2.7 | length 83.3
  Top Layer w0.254: C2.1 10,41.75 J4.1 ; U1.7 26.035,36.3 J4.1 ; U2.7 51.735,28.835 46.8,23.9 C8.1 22.4,23.9 J4.1
pads on no net: P5.1 P5.2 P5.3 P5.4 P5.5 P5.6 P5.7 P5.8 P5.9 P5.10 P5.11 P5.12 P5.13 P5.14 P5.15 P5.16 P5.17 P5.18 P5.19 P5.20 P6.1 P6.2 P6.3 P6.4 P6.5 P6.6 P6.8 P6.9 P6.10 P6.12 P6.14 P6.16 P7.2 P7.4 P7.6 P7.8 P7.9 P7.10 P7.11 P7.12 P7.13 P7.14 P7.15 P7.16 P7.17 P7.18 P7.19 P7.20 P7.21 P7.22 P7.23 P7.24 P7.25 P7.26 P7.27 P7.28 P7.29 P7.30 P8.1 P8.2 P8.3 P8.4 P8.5 P8.6 P8.7 P8.8 P8.9 P8.10 P8.11 P8.12 P8.13 P8.14 P8.15 P8.16 P8.17 P8.18 P8.19 P8.20 P8.21 P8.22 P8.23 P8.24 P8.25 P8.26 P8.27 P8.28 P8.29 P8.30 P8.31 P8.32 P8.33 P8.34

## Polygon pours and split planes (outlines as drawn)
GND on Ground Plane (split plane): 131.005,69.482 131.197,69.454 131.386,69.407 131.569,69.341 131.745,69.258 131.911,69.158 132.068,69.042 132.212,68.912 132.342,68.768 132.458,68.611 132.558,68.445 132.641,68.269 132.707,68.086 132.754,67.897 132.782,67.705 132.791,67.526 132.79,67.511 132.79,2.489 132.791,2.474 132.782,2.295 132.754,2.103 132.707,1.914 132.641,1.731 132.558,1.555 132.458,1.389 132.342,1.232 132.212,1.088 132.068,0.958 131.911,0.842 131.745,0.742 131.569,0.659 131.386,0.593 131.197,0.546 131.005,0.518 130.826,0.509 130.811,0.51 2.489,0.51 2.474,0.509 2.295,0.518 2.103,0.546 1.914,0.593 1.731,0.659 1.555,0.742 1.389,0.842 1.232,0.958 1.088,1.088 0.958,1.232 0.842,1.389 0.742,1.555 0.659,1.731 0.593,1.914 0.546,2.103 0.518,2.295 0.509,2.474 0.51,2.489 0.51,67.511 0.509,67.526 0.518,67.705 0.546,67.897 0.593,68.086 0.659,68.269 0.742,68.445 0.842,68.611 0.958,68.768 1.088,68.912 1.232,69.042 1.389,69.158 1.555,69.258 1.731,69.341 1.914,69.407 2.103,69.454 2.295,69.482 2.474,69.491 2.489,69.49 130.811,69.49 130.826,69.491

## Silkscreen, mask and mechanical layers (free items; w line width, h text height)
Top Overlay:
  text "Signal Hyd 1" at 110.1,64 h0.75
  text "+ 12 V" at 113.7,52.5 h0.75
  text "- 12 V" at 113.9,46.7 h0.75
  text "+12V adjustment" at 48.5,46.5 h0.51
  text "Signal Hyd 2" at 109.5,43 h0.75
  text "+" at 14,36 h0.75
  text "-12V adjustment" at 36.4,35.2 h0.51 r90
  text "-" at 14,33.5 h0.75
  text "+ 12 V" at 113.8,32.4 h0.75
  text "- 12 V" at 113.8,26.9 h0.75
  text "Signal Hyd 3" at 109.8,22 h0.75
  text "+ 12 V" at 113.4,12 h0.75
  text "- 12 V" at 113.4,6.4 h0.75

## Text inside footprints (layer, text, board x,y; h text height)
D3: Top Overlay "K" at 22,33.548 h0.51 r90
D6: Top Overlay "K" at 53.9,32.1 h0.51 r180
P5: Top Overlay "2" at 102.04,10.66 h0.51; Top Overlay "1" at 102.14,13.16 h0.51; Top Overlay "19" at 77.14,14.96 h0.51; Top Overlay "20" at 77.04,8.76 h0.51
P6: Top Overlay "2" at 93,56.4 h0.51; Top Overlay "1" at 93.1,58.9 h0.51; Top Overlay "15" at 71,58.9 h0.51; Top Overlay "16" at 71,56.3 h0.51
P7: Top Overlay "30" at 30.2,55.1 h0.51; Top Overlay "29" at 30.2,60.1 h0.51; Top Overlay "2" at 70,56.3 h0.51; Top Overlay "1" at 70.1,58.9 h0.51
P8: Top Overlay "34" at 32.4,8.8 h0.51; Top Overlay "33" at 32.4,14.9 h0.51; Top Overlay "1" at 75.1,13.2 h0.51; Top Overlay "2" at 75.1,10.6 h0.51